# Altium PCB TS4994_Add_on_v1.PcbDoc
Units mm, origin at the board's own origin, x right, y up, seen from the top; angles counter-clockwise.
Board outline 20 x 18 mm, 2 copper layers (Top Layer, Bottom Layer), stack 0.324 mm thick; 11 components, 9 nets, 31 pads, 11 vias.
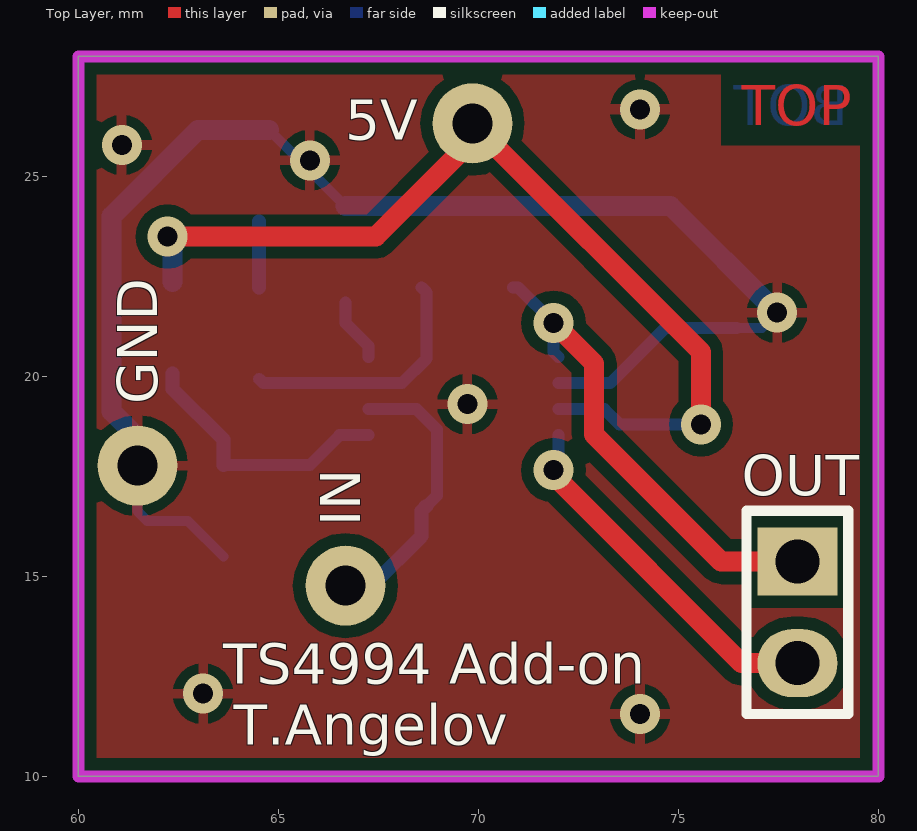
[diagram p0: Top Layer view]
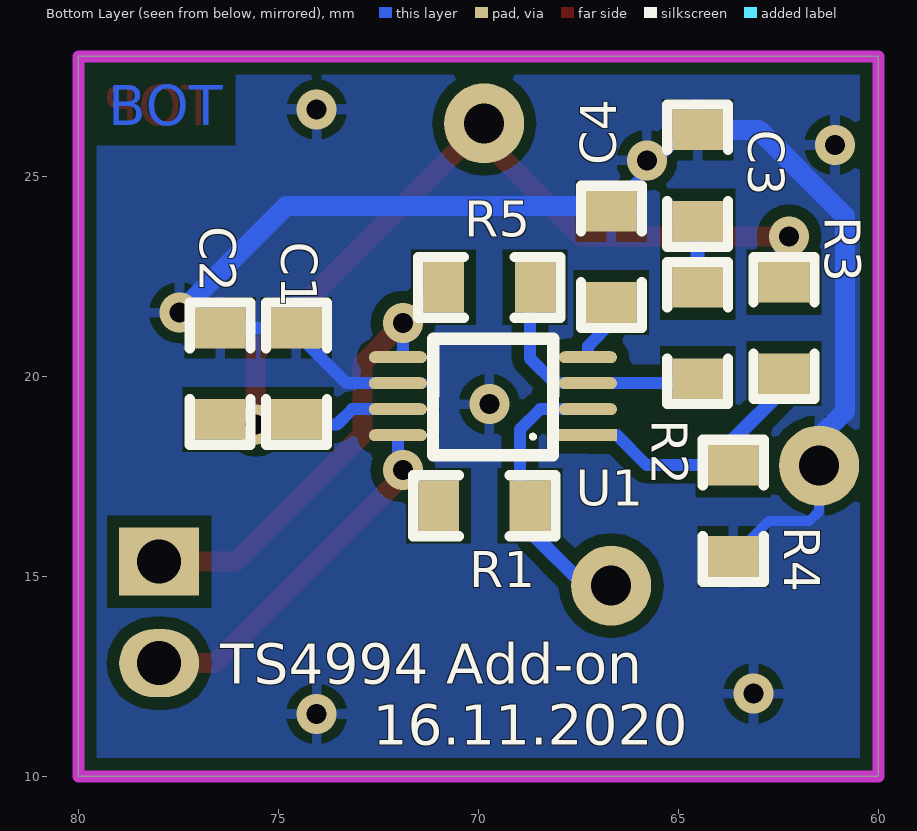
[diagram p1: Bottom Layer view, seen from below]

## Layer stack, top to bottom
Top Solder: solder mask 0.0102, Solder Resist, Dk 3.5
Top Layer: signal copper 0.035
Dielectric1: core 0.254, FR-4, Dk 4.2
Bottom Layer: signal copper 0.035
Bottom Solder: solder mask 0.0102, Solder Resist, Dk 3.5

## Board outline
60,10 80,10 80,28 60,28

## Design rules (kind name [scope] priority, off if disabled: settings)
Clearance [All] p1: gap=0.3 ignorepadtopadclearanceinfootprint=FALSE
HoleSize [All] p1 off: absolutevalues=TRUE maxlimit=2.54 minlimit=0.5 maxpercent=80.000 minpercent=20.000
HoleToHoleClearance [All] p1 off: gap=0.254 allowstackedmicrovias=TRUE
LayerPairs [All] p1 off: enforce=TRUE
MinimumSolderMaskSliver [All] p1 off: minsoldermaskwidth=0.254
NetAntennae [All] p1 off: netantennaetolerance=0
PolygonConnect [All] p1: connectstyle=Relief reliefconductorwidth=0.254 reliefentries=4 polygonreliefangle="90 Angle" airgapwidth=0.254
RoutingVias [All] p1: holewidth=0.5 width=0.9 viastyle="Through Hole" minholewidth=0.3 minwidth=0.5 maxholewidth=0.9 maxwidth=2
SilkToSilkClearance [All] p1 off: silktosilkclearance=0.254
SilkToSolderMaskClearance SilkscreenOverComponentPads [IsPad] p1 off: minsilkscreentomaskgap=0.254 clearancetoexposedcopper=TRUE
SolderMaskExpansion [All] p1: expansion=0.102
Width [All] p1: maxlimit=2 minlimit=0.2 preferedwidth=0.35
23 further rules are at their usual default settings.

## Classes and differential pairs
component class TS4994_Add_on_v1: C1 C2 C3 C4 R1 R2 R3 R4 R5 U1

## Components (designator, comment, footprint, x,y, rotation, side; value= is the part's Value field where it differs from the comment)
C1 "C0805" 0805S 74.549,21.209 r270 bottom value=100n
C2 "C0805" 0805S 76.454,21.209 r270 bottom value=2.2u
C3 "C0805" 0805S 64.516,26.162 r270 bottom value=1u
C4 "C0805" 0805S 66.675,24.13 r270 bottom value=1uF
R1 "R0805" 0805S 68.707,16.764 r0 bottom value=120k
R2 "R0805" 0805S 64.516,22.225 r270 bottom value=10k
R3 "R0805" 0805S 62.357,20.066 r90 bottom value=1k
R4 "R0805" 0805S 63.627,15.494 r90 bottom value=1k
R5 "R0805" 0805S 68.58,22.225 r0 bottom value=120k
SPEAKER "" 51022-0200 78.613,14.097 r270 top locked
U1 "TS4994IST" MSOP8 67.259,18.527 r90 bottom

## Footprints (in the part's own frame and the unit in brackets; to place one, negate y for a bottom-side part, rotate by r counter-clockwise, add the part's x,y. Pads: shape width x height; smd on the part's side, far side on the other; paste and mask are expansions set on the pad)
0805S [mil]
  rect 40x50 smd: 1(0,0) 2(90,0)
  silkscreen extent -25,-30 115,30
51022-0200 [mm]
  rect 1.7x2 hole 1.1: 1(-1.27,-0.635)
  oval 1.7x2 hole 1.1: 2(1.27,-0.635)
  silkscreen extent -2.54,-1.91 2.54,0.64
MSOP8 [mm]
  rect 0.3x1.45 smd: 1(0,0)
  oval 0.3x1.45 smd: 2(0.65,0) 3(1.3,0) 4(1.95,0) 5(1.95,4.75) 6(1.3,4.75) 7(0.65,4.75) 8(0,4.75)
  silkscreen extent -0.5,0.87 2.41,3.87

## Part data
C1 C2 C3 C4: "Capacitor"
R1 R2 R3 R4 R5: "Resistor"
SPEAKER: library part 51022-0200, "51022-0200"

## Free pads (board coordinates)
  round 2 hole 1: 3(61.478,17.767) 3(66.678,14.767) 3(69.853,26.324)

## Via types
v1: diameter 1, hole 0.5, Top Layer to Bottom Layer, 11 vias

## Nets (pads, with @x,y where several pads share a name; then routed paths per layer and width w, separated by ;. In a path a pad name is that pad's centre, name@x,y a point inside that pad or via, vN(x,y) a via of type N, cw(c..) or ccw(c..) an arc to the next point about the centre after c; other vN are vias at no path point)
5V: C1.2 C2.2 pad.3@69.853,26.324 R3.2 U1.7 | length 23.6
  Top Layer w0.5: v1(62.23,23.495) 67.437,23.495 70.059,26.117 75.565,20.612 v1(75.565,18.796)
  Bottom Layer w0.3: U1.7 73.152,19.177 73.533,18.796 v1(75.565,18.796)
  Bottom Layer w0.5: v1(62.23,23.495) 62.103,23.495 62.357,23.241 R3.2
GND: C1.1 C2.1 C3.1 C4.1 pad.3@61.478,17.767 R4.1 U1.6 | length 36.1
  Bottom Layer w0.25: pad.3@61.478,17.767 61.478,16.627 61.722,16.383 62.738,16.383 R4.1 ; C3.1@64.77,26.162 v1@65.722,25.209 ; v1(65.786,25.4) 65.786,25.273 v1@65.722,25.209 ; C4.1@66.675,24.257 v1@65.722,25.209 ; C2.1 77.089,21.209 v1(77.47,21.59)
  Bottom Layer w0.3: U1.6 73.294,19.827 74.676,21.209 C2.1
  Bottom Layer w0.5: pad.3@61.478,17.767 61.478,18.476 60.833,19.121 60.833,24.003 62.992,26.162 C3.1 C3.1@64.77,26.162 ; C4.1@66.675,24.257 74.803,24.257 v1(77.47,21.59)
  other v1: 74.041,11.557 63.119,12.065 69.726,19.304 61.087,25.781 74.041,26.67
NetC3_2: C3.2 R2.1 | length 1.7
  Bottom Layer w0.35: R2.1 C3.2
NetC4_2: C4.2 U1.4 | length 1.6
  Bottom Layer w0.3: C4.2 66.675,21.336 67.259,20.752 U1.4
NetR1_1: pad.3@66.678,14.767 R1.1 U1.2 | length 7.2
  Bottom Layer w0.3: U1.2 68.453,19.177 68.961,18.669 68.961,17.018 R1.1
  Bottom Layer w0.35: pad.3@66.678,14.767 67.345,14.767 68.58,16.002 68.58,16.637 R1.1
NetR1_2: R1.2 SPEAKER.2 U1.8 | length 9.2
  Top Layer w0.5: v1(71.882,17.653) 72.009,17.653 72.009,17.399 76.581,12.827 SPEAKER.2
  Bottom Layer w0.3: v1@72.009,17.78 U1.8
  Bottom Layer w0.35: v1(71.882,17.653) v1@72.009,17.78
NetR2_2: R2.2 R5.1 U1.3 | length 6.3
  Bottom Layer w0.3: R2.2 64.628,19.827 U1.3 68.087,19.827 68.707,20.447 68.707,22.098 R5.1
NetR3_1: R3.1 R4.2 U1.1 | length 6.8
  Bottom Layer w0.3: R4.2 65.786,17.78 66.533,18.527 U1.1
  Bottom Layer w0.35: R3.1 62.357,19.685 63.627,18.415 R4.2
NetR5_2: R5.2 SPEAKER.1 U1.5 | length 11.9
  Top Layer w0.5: v1(71.882,21.336) 72.898,20.32 72.898,18.542 76.073,15.367 SPEAKER.1
  Bottom Layer w0.3: R5.2 70.993,22.225 v1(71.882,21.336) 71.882,20.604 U1.5

## Polygon pours and split planes (outlines as drawn)
GND on Bottom Layer "Bottom Layer-GND" (solid, remove dead copper, pour order 18): 60,28 60,10 80,10 79.883,10.117 79.883,28
GND on Top Layer "Top Layer-GND" (solid, remove dead copper, pour order 20): 60,28 60,10 80,10 80,28

## Keep-outs
Keep-Out Layer:
  the board outline again, w0.3

## Other copper
Top Layer:
  text "TOP" at 76.581,26.282 h1
Bottom Layer:
  text "BOT" at 79.248,26.282 h1

## Silkscreen, mask and mechanical layers (free items; w line width, h text height)
Top Overlay:
  text "5V" at 66.675,25.908 h1
  text "GND" at 61.976,19.304 h1 r90
  text "OUT" at 76.581,17.028 h1
  text "IN" at 67.046,16.256 h1 r90
  text "TS4994 Add-on" at 63.627,12.319 h1
  text "T.Angelov" at 63.881,10.795 h1
Bottom Overlay:
  text "TS4994 Add-on" at 76.454,12.319 h1
  text "16.11.2020" at 72.644,10.795 h1

## Text inside footprints (layer, text, board x,y; h text height)
SPEAKER: Mechanical 1 "BOARD EDGE" at 79.614,16.279 h0.42 r270